# Altium PCB GD_Power_Meter_Draft.PCBDOC
Units mm, origin at the board's own origin, x right, y up, seen from the top; angles counter-clockwise.
Board outline 113.75 x 112.25 mm, 2 copper layers (Top Layer, Bottom Layer); 84 components, 54 nets, 246 pads, 261 vias.
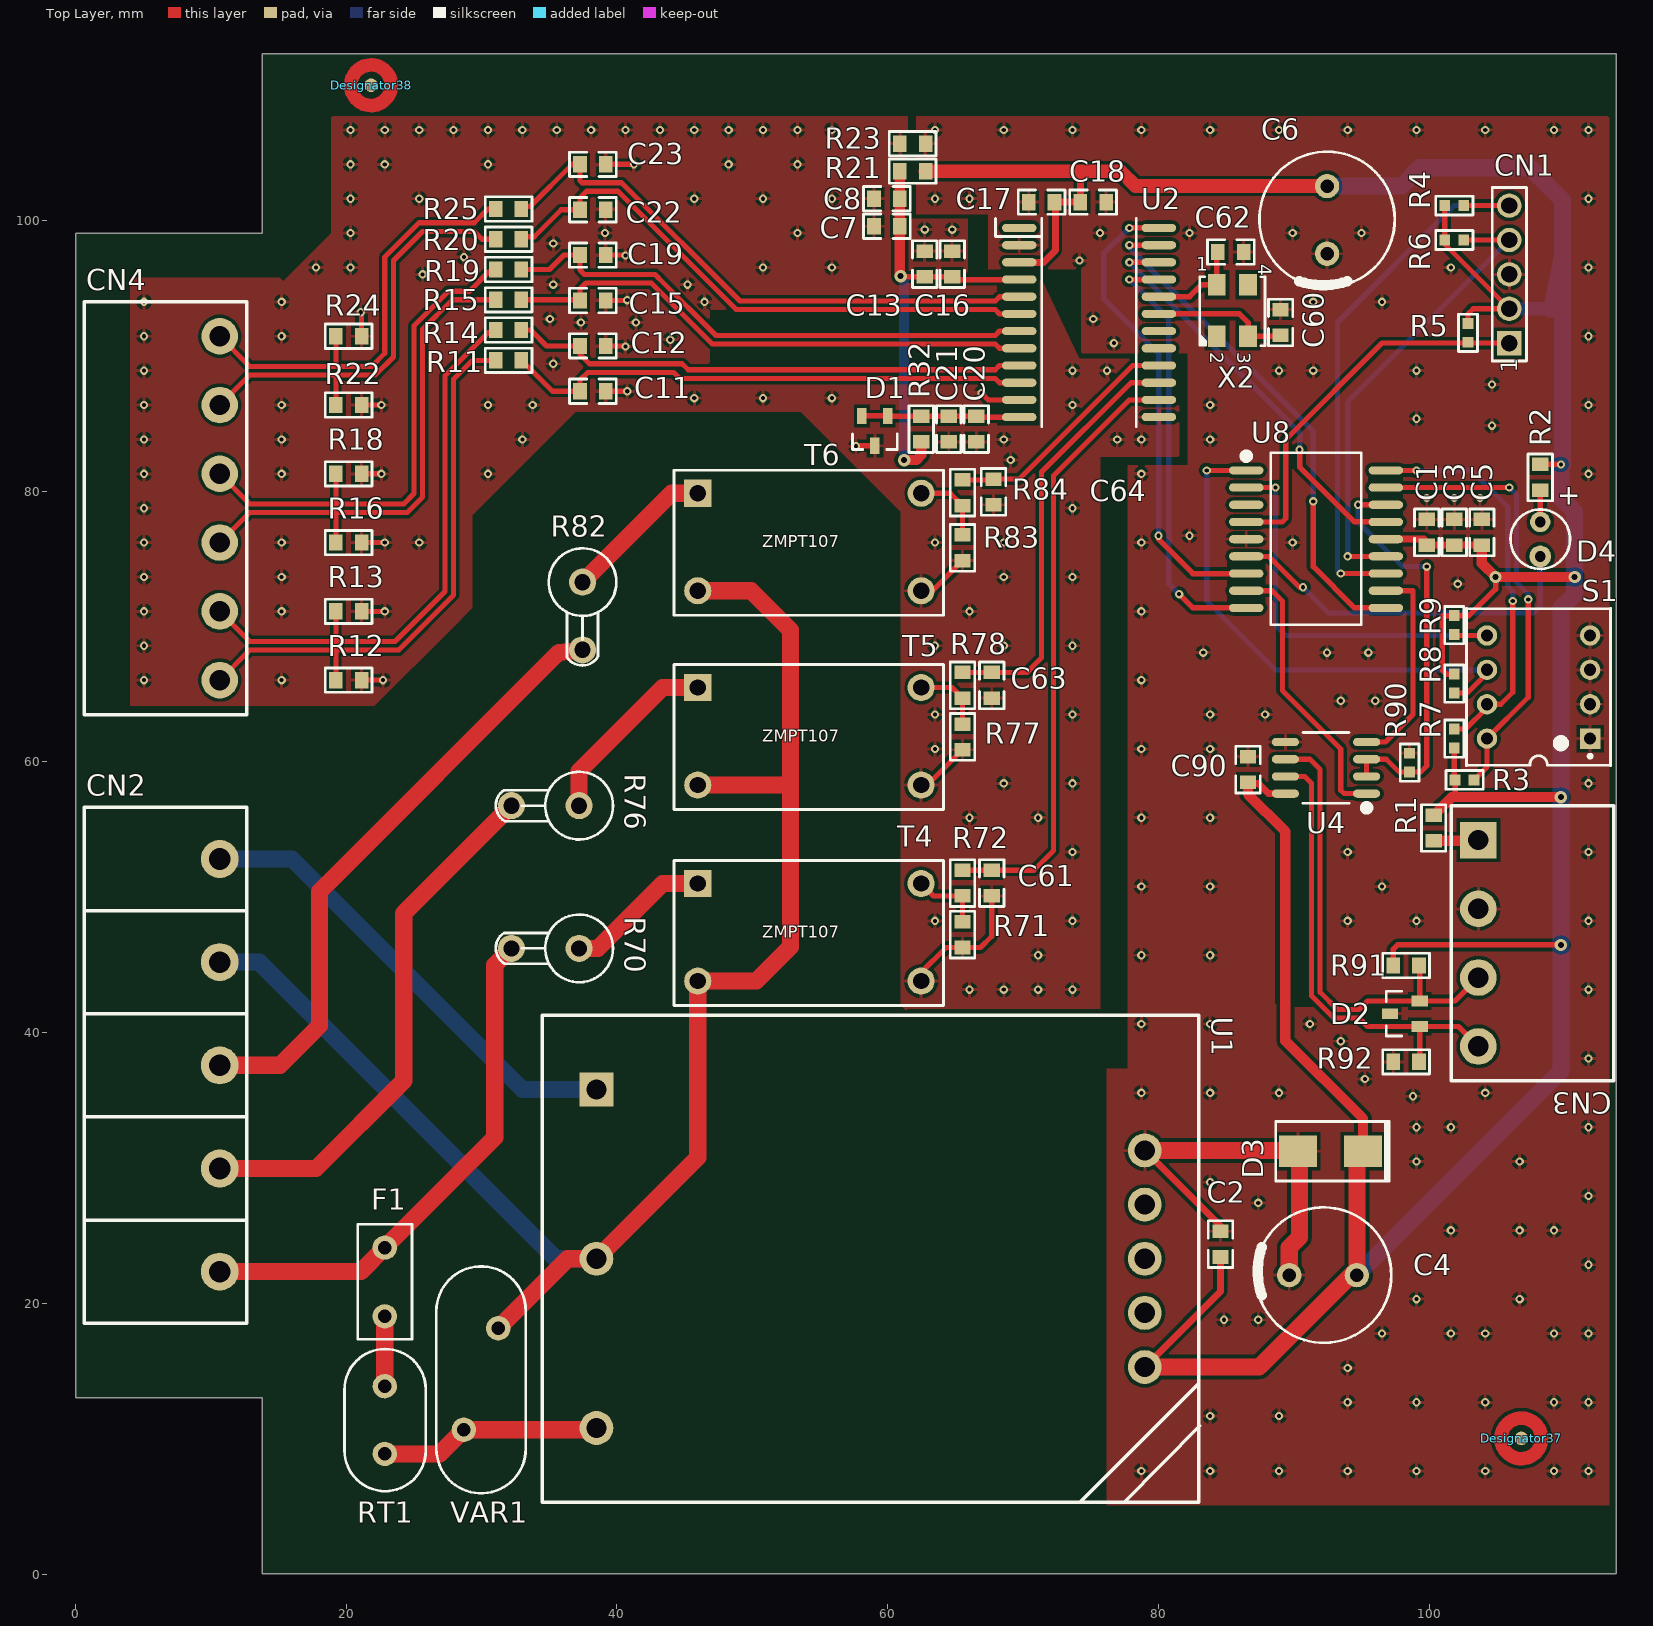
[diagram p0: Top Layer view]
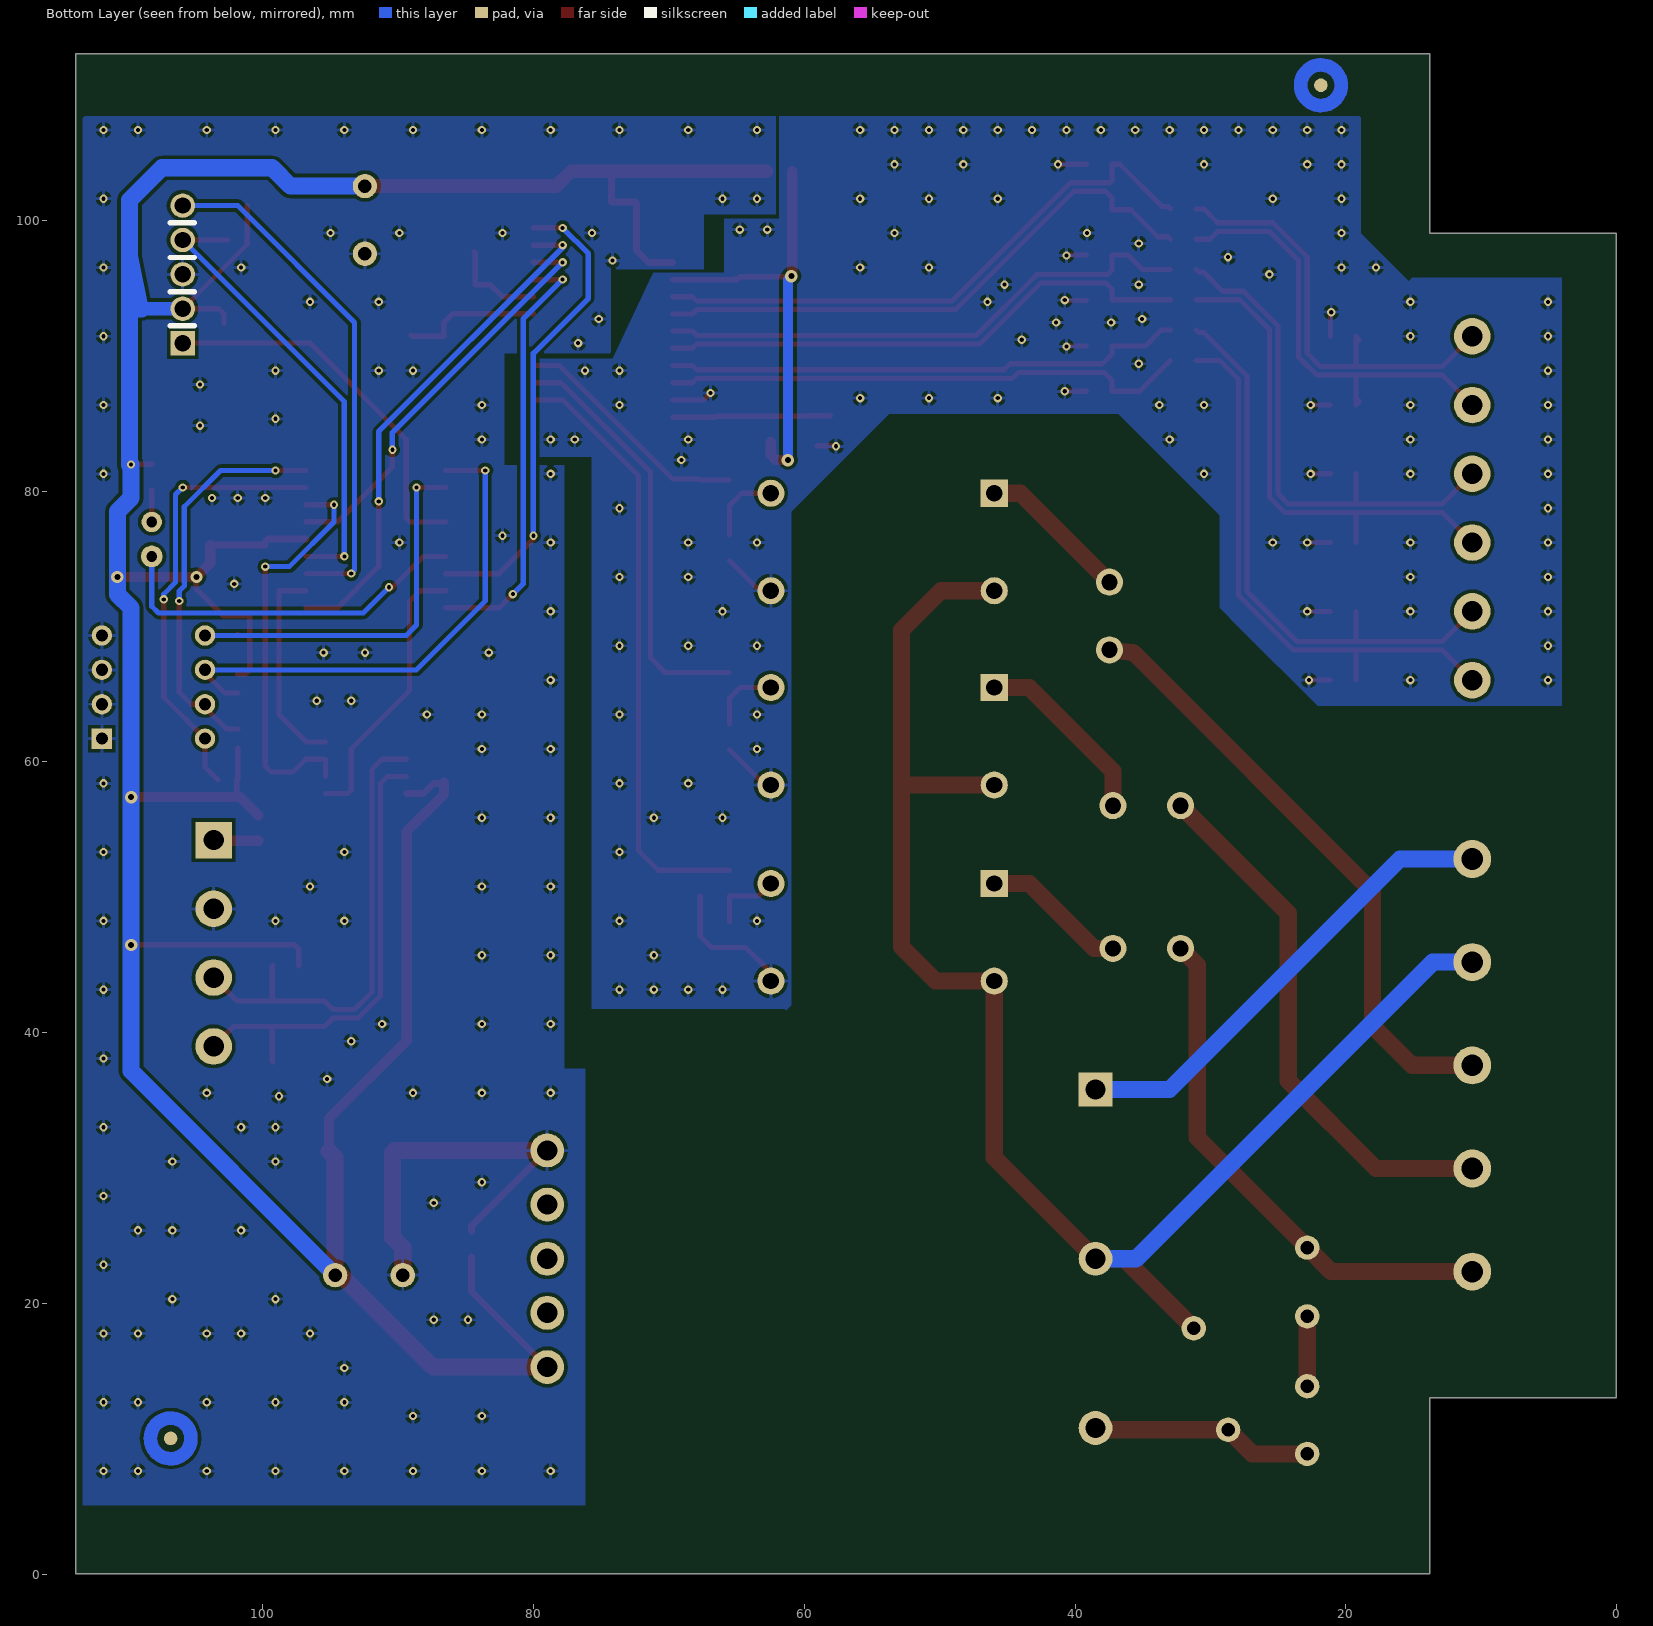
[diagram p1: Bottom Layer view, seen from below]

## Layer stack, top to bottom
Top Solder: solder mask 0.0102, Solder Resist, Dk 3.5
Top Layer: signal copper 0.0356
Dielectric 1: dielectric 0.32, FR-4, Dk 4.8
Bottom Layer: signal copper 0.0356
Bottom Solder: solder mask 0.0102, Solder Resist, Dk 3.5

## Board outline
0.05,99.04 0.05,13.04 13.8,13.04 13.8,0.04 113.8,0.04 113.8,112.29 13.8,112.29 13.8,99.04

## Design rules (kind name [scope] priority, off if disabled: settings)
Clearance [All] p1: gap=0.254 except(0.127: SMDPad-Text THPad-Text)
DiffPairsRouting [All] p1: maxlimit=0.254 minlimit=0.254 mostfreqgap=0.254 toplayer_minwidth=0.381 toplayer_maxwidth=0.381 toplayer_prefwidth=0.381 bottomlayer_minwidth=0.381 bottomlayer_maxwidth=0.381 bottomlayer_prefwidth=0.381 maxuncoupledlength=12.7
PolygonConnect [All] p1: connectstyle=Relief reliefconductorwidth=0.254 reliefentries=4 polygonreliefangle="90 Angle" airgapwidth=0.254
RoutingVias [All] p1: holewidth=0.305 width=0.61 viastyle="Through Hole" minholewidth=0.254 minwidth=0.508 maxholewidth=0.711 maxwidth=1.27
SilkToSilkClearance [All] p1: silktosilkclearance=0.025
SilkToSolderMaskClearance [IsPad] p1: minsilkscreentomaskgap=0.025 clearancetoexposedcopper=TRUE
SolderMaskExpansion [All] p1: expansion=0.102
UnpouredPolygon [All] p1: allowunpoured=FALSE
Width [All] p1: maxlimit=1.27 minlimit=0.254 preferedwidth=0.254
26 further rules are at their usual default settings.

## Classes and differential pairs
component class 7758_1: C7 C8 C11 C12 C13 C15 C16 C17 C18 C19 C20 C21 C22 C23 C60 C61 C62 C63 C64 CN4 D1 R11 R12 R13 R14 R15 R16 R18 R19 R20 R21 R22 R23 R24 R25 R32 R70 R71 R72 R76 R77 R78 R82 R83 R84 T4 T5 T6 U2 X2
component class GD_Power_Meter_1: C1 C2 C3 C4 C5 C6 C90 CN1 CN2 CN3 D2 D3 D4 F1 R1 R2 R3 R4 R5 R6 R7 R8 R9 R90 R91 R92 RT1 S1 U1 U4 U8 VAR1
differential pair IA: +IC_P -IC_N
differential pair IB: +IB_P -IB_N
differential pair IC: +IA_P -IA_N
differential pair A: +A_P -A_N
differential pair B: +B_P -B_N
differential pair C: +C_P -C_N
differential pair RS485: +RS485_P -RS485_N

## Components (designator, comment, footprint, x,y, rotation, side; value= is the part's Value field where it differs from the comment)
C1 "CAP" C0805 99.822,76.962 r90 top
C2 "CAP" C0805 84.582,24.384 r90 top
C3 "CAP" C0805 101.854,76.962 r90 top
C4 "CAPACITOR" CA10X16P5 89.662,22.098 r0 top
C5 "CAP" C0805 103.886,76.962 r90 top
C6 "CAPACITOR" CA10X16P5 92.456,97.536 r90 top
C7 "CAP" C0805 59.944,99.568 r0 top
C8 "CAP" C0805 59.944,101.6 r0 top
C11 "CAP" C0805 38.227,87.376 r180 top
C12 "CAP" C0805 38.227,90.729 r180 top
C13 "10uF" C0805 62.738,96.774 r270 top
C15 "CAP" C0805 38.227,94.082 r180 top
C16 "CAP" C0805 64.77,96.774 r270 top
C17 "10uF" C0805 71.374,101.346 r180 top
C18 "CAP" C0805 75.184,101.346 r0 top
C19 "CAP" C0805 38.227,97.434 r180 top
C20 "CAP" C0805 66.548,84.582 r90 top
C21 "CAP" C0805 64.516,84.582 r90 top
C22 "CAP" C0805 38.227,100.787 r180 top
C23 "CAP" C0805 38.227,104.14 r180 top
C60 "CAP" C0805 89.027,92.456 r90 top
C61 "CAP" C0805 67.691,51.054 r90 top
C62 "CAP" C0805 85.344,97.663 r0 top
C63 "CAP" C0805 67.691,65.659 r90 top
C64 "CAP" C0805 67.818,79.944 r90 top
C90 "CAP" C0805 86.614,59.436 r90 top
CN1 "SIP5" SIP5 105.918,90.932 r90 top
CN2 "Header 5" KF7.62-5P 10.668,22.352 r90 top locked
CN3 "Header 4" HT5.08-4P-H 103.632,54.229 r270 top
CN4 "Header 6" HT5.08-6P-H 10.668,66.04 r90 top
D1 "Diode-3_2" SOT23-321 59.055,84.455 r180 top
D2 "TVS-D" SOT23-123 98.298,41.402 r90 top
D3 "ZENER" SMB 92.71,31.242 r180 top
D4 "ED00056" LED_DIP 108.204,76.454 r270 top
Designator37 "Comment" MARK2 106.807,10.033 r270 top
Designator38 "Comment" MARK2 21.844,109.982 r270 top
F1 "Fuse" 392XXXX000 22.86,24.13 r270 top
R1 "RES" R0805 100.33,55.118 r90 top
R2 "RES" R0805 108.204,81.026 r90 top
R3 "RES" R0603 102.616,58.674 r0 top
R4 "RES" R0603 101.854,101.092 r0 top
R5 "RES" R0603 102.87,91.694 r270 top
R6 "RES" R0603 101.854,98.552 r0 top
R7 "RES" R0603 101.854,61.722 r90 top
R8 "RES" R0603 101.854,65.786 r270 top
R9 "RES" R0603 101.854,70.104 r270 top
R11 "RES" R0805 32.004,89.662 r0 top
R12 "RES" R0805 20.193,66.04 r0 top
R13 "RES" R0805 20.193,71.12 r0 top
R14 "RES" R0805 32.004,91.897 r0 top
R15 "RES" R0805 32.004,94.132 r0 top
R16 "RES" R0805 20.193,76.2 r0 top
R18 "RES" R0805 20.193,81.28 r0 top
R19 "RES" R0805 32.004,96.368 r0 top
R20 "RES" R0805 32.004,98.603 r0 top
R21 "RES" R0805 61.849,103.632 r180 top
R22 "RES" R0805 20.193,86.36 r0 top
R23 "RES" R0805 61.849,105.664 r0 top
R24 "RES" R0805 20.193,91.44 r0 top
R25 "RES" R0805 32.004,100.838 r0 top
R32 "RES" R0805 62.484,84.582 r270 top
R70 "RES" MFR5W2P5 32.211,46.228 r0 top
R71 "RES" R0805 65.532,47.244 r90 top
R72 "RES" R0805 65.532,51.054 r90 top
R76 "RES" MFR5W2P5 32.211,56.769 r0 top
R77 "RES" R0805 65.532,61.849 r90 top
R78 "RES" R0805 65.532,65.659 r90 top
R82 "RES" MFR5W2P5 37.465,68.279 r90 top
R83 "RES" R0805 65.532,75.819 r90 top
R84 "RES" R0805 65.532,79.883 r90 top
R90 "RES" R0603 98.552,59.944 r270 top
R91 "RES" R0805 98.298,44.958 r0 top
R92 "RES" R0805 98.298,37.846 r180 top
RT1 "NTC" NTC8_5x6P5 22.86,13.89 r270 top
S1 "SW-DIP4" SW_4P 108.077,65.532 r180 top
T4 "ET00010" ZMPT107 54.224,47.415 r0 top
T5 "ET00010" ZMPT107 54.224,61.893 r0 top
T6 "ET00010" ZMPT107 54.224,76.244 r0 top
U1 "LH05-10B05" LH05X 38.494,35.804 r0 top locked
U2 "ADE7758" SOIC24-W 69.723,99.441 r270 top
U4 "SN65HVD11D" SOIC8 95.377,57.658 r90 top
U8 "PIC16LF1827" SO18 86.487,81.534 r270 top
VAR1 "VARISTOR" VAR16_7X6_6P7_5 31.242,18.168 r270 top
X2 "ABM3C" XTAL_5X3_2 85.471,93.345 r270 top

## Footprints (in the part's own frame and the unit in brackets; to place one, negate y for a bottom-side part, rotate by r counter-clockwise, add the part's x,y. Pads: shape width x height; smd on the part's side, far side on the other; paste and mask are expansions set on the pad)
392XXXX000 [mm] "8.5X4X8"
  round 1.8 hole 1: 1(0,0) 2(5.08,0)
  silkscreen extent -1.73,-1.99 6.77,2.01, body extent -1.73,-1.99 6.77,2.01, height 8
C0805 [mm]
  rect 1x1.2 smd: 1(-0.95,0) 2(0.95,0)
  silkscreen extent -1.73,-0.9 1.73,0.9, body extent -1.55,-0.7 1.55,0.7, height 1
CA10X16P5 [mm]
  round 1.8 hole 1: 1(0,0) 2(5,0)
  silkscreen extent -2.46,-5 7.54,5, body extent -2.47,-5.01 7.55,5.01, height 16
HT5.08-4P-H [mm]
  rect 2.7x2.7 hole 1.5: 1(0,0)
  round 2.7 hole 1.5: 2(5.08,0) 3(10.16,0) 4(15.24,0)
  silkscreen extent -2.54,-2 17.78,10, body extent -2.54,-2.03 17.78,10.03, height 12
HT5.08-6P-H [mm]
  round 2.7 hole 1.5: 1(0,0) 2(5.08,0) 3(10.16,0) 4(15.24,0) 5(20.32,0) 6(25.4,0)
  silkscreen extent -2.54,-2 27.94,10, body extent -2.54,-2.03 27.94,10.03, height 12
KF7.62-5P [mm]
  round 2.8 hole 1.6: 1(0,0) 2(7.62,0) 3(15.24,0) 4(22.86,0) 5(30.48,0)
  silkscreen extent -3.81,-2 34.29,10, body extent -3.68,-1.91 34.16,9.91, height 12.4
LED_DIP [mm]
  round 1.5 hole 0.8: 1(-1.27,0)
  round 1.6 hole 0.8: 2(1.27,0)
  silkscreen extent -2.2,-2.2 2.2,2.2, body extent -2.18,-2.2 2.2,2.2, height 5
LH05X [mm]
  rect 2.5x2.5 hole 1.5: 1(0,0)
  round 2.5 hole 1.5: 2(0,-12.5) 3(0,-25) 4(40.5,-4.5) 5(40.5,-8.5) 6(40.5,-12.5) 7(40.5,-16.5) 8(40.5,-20.5)
  silkscreen extent -4,-30.5 44.56,5.5, body extent -3.94,-30.48 44.58,5.46, height 20.5
MARK2 [mm]
  round 1 smd: 1(0,0)
  round 1 smd far side: 1(0,0)
  Top Layer circle w1: c0,0 r1.5
  Bottom Layer circle w1: c0,0 r1.5
MFR5W2P5 [mm]
  round 2 hole 1.2: 1(0,0) 2(5,0)
  silkscreen extent -1.15,-2.5 7.5,2.5, body extent -1.1,-2.49 7.5,2.5, height 15.5
NTC8_5x6P5 [mm] "8_5x6P5x13"
  round 1.8 hole 1: 1(0,0) 2(5,0)
  silkscreen extent -2.75,-2.98 7.75,3.03, body extent -2.9,-3.1 7.8,3.1, height 13
R0603 [mm]
  rect 0.8x0.8 smd: 1(-0.7,0) 2(0.7,0)
  silkscreen extent -1.38,-0.7 1.38,0.7
R0805 [mm]
  rect 1x1.2 smd: 1(-0.95,0) 2(0.95,0)
  silkscreen extent -1.73,-0.9 1.73,0.9, body extent -1.55,-0.7 1.55,0.7, height 1
SIP5 [mm]
  rect 1.8x1.8 hole 1.2: 1(0,0)
  round 1.8 hole 1.2: 2(2.54,0) 3(5.08,0) 4(7.62,0) 5(10.16,0)
  silkscreen extent -1.32,-1.27 11.5,1.27, body extent -1.42,-1.37 11.6,1.37, height 7
SMB [mm] "P6SMB"
  rect 2.8x2.3 smd: 1(-2.4,0) 2(2.4,0)
  silkscreen extent -4.35,-2.2 4.05,2.2, body extent -4.45,-2.3 4.15,2.3, height 2.5
SO18 [mil]
  oval 24x100 smd: 1(0,0) 2(50,0) 3(100,0) 4(150,0) 5(200,0) 6(250,0) 7(300,0) 8(350,0) 9(400,0) 10(400,406) 11(350,406) 12(300,406) 13(250,406) 14(200,406) 15(150,406) 16(100,406) 17(50,406) 18(0,406)
  silkscreen extent -51,-10 449,335, body extent -51,71 449,335, height 102
SOIC8 [mm]
  oval 0.61x2 smd: 1(0,0) 2(1.27,0) 3(2.54,0) 4(3.81,0) 5(3.81,6) 6(2.54,6) 7(1.27,6) 8(0,6)
  silkscreen extent -1.3,-0.25 4.51,4.7, body extent -0.7,1.3 4.51,4.7, height 1.75
SOIC24-W [mm]
  oval 0.61x2.54 smd: 1(0,0) 2(1.27,0) 3(2.54,0) 4(3.81,0) 5(5.08,0) 6(6.35,0) 7(7.62,0) 8(8.89,0) 9(10.16,0) 10(11.43,0) 11(12.7,0) 12(13.97,0) 13(13.97,10.312) 14(12.7,10.312) 15(11.43,10.312) 16(10.16,10.312) 17(8.89,10.312) 18(7.62,10.312) 19(6.35,10.312) 20(5.08,10.312) 21(3.81,10.312) 22(2.54,10.312) 23(1.27,10.312) 24(0,10.312)
  silkscreen extent -0.7,-1.75 14.67,8.64, body extent -0.7,1.65 14.67,8.64, height 2.5
SOT23-123 [mm]
  rect 0.8x1.2 smd: 1(-0.95,-1) 2(0.95,-1) 3(0,1.2)
  silkscreen extent -1.65,0.33 1.65,1.48, body extent -1.6,-1.3 1.6,1.3, height 1.2
SOT23-321 [mm]
  rect 0.7x1.2 smd: 1(0,1.1) 2(0.95,-1.1) 3(-0.95,-1.1)
  silkscreen extent -1.65,0.23 1.65,1.38
SW_4P [mm] "DIP; 8 Leads; Row Spacing 7.62 mm; Pitch 2.54 mm"
  rect 1.5x1.5 hole 0.9: 1(-3.81,3.81)
  round 1.5 hole 0.9: 2(-3.81,1.27) 3(-3.81,-1.27) 4(-3.81,-3.81) 5(3.81,-3.81) 6(3.81,-1.27) 7(3.81,1.27) 8(3.81,3.81)
  silkscreen extent -5.32,-5.81 5.32,5.81, body extent -5.33,-5.72 5.33,5.72, height 9.8
VAR16_7X6_6P7_5 [mm]
  round 1.8 hole 1: 1(0,0) 2(7.5,-2.54)
  silkscreen extent -4.57,-4.57 12.19,2.03, body extent -4.5,-4.6 12.2,2, height 21
XTAL_5X3_2 [mm] "ABM3C"
  rect 1.6x1.3 smd: 1(-1.9,-1.15) 2(1.9,-1.15) 3(1.9,1.15) 4(-1.9,1.15)
  silkscreen extent -2.5,-2.42 2.6,2.4, body extent -2.5,-2.42 2.6,2.4, height 2
ZMPT107 [mm]
  rect 2x2 hole 1.2: 1(-8.25,3.6)
  round 2 hole 1.2: 2(-8.25,-3.6) 3(8.25,3.6) 4(8.25,-3.6)
  silkscreen extent -10,-5.4 9.9,5.3, body extent -10.1,-5.5 10,5.4, height 18.9

## Part data
C1 C2 C8 C16 C18 C20 C90: library part EC00014, "CAP SMD CR X7R 50V 10% 0.1uF 0805 ROHS"
C3: library part EC00018, "CAP SMD CR X7R 50V 10% 10nF 0805 ROHS"
C4 C6: library part EC00095, "CAP 35V 20% 330uF 10X16X0.6MM ROHS，7000hours"
C5 C7 C21: library part EC00002, "CAP SMD CR X7R 50V 10% 1uF 0805 ROHS"
C11 C12 C15 C19 C22 C23 C61 C63 C64: library part EC00079, "CAP SMD X7R 50V 10% 0.033uF 0805 ROHS"
C13 C17: library part EC00034, "CAP SMD CR X5R 16V 10% 10uF 0805 ROHS"
C60 C62: library part EC00017, "CAP SMD C0G 50V 5% 33pF 0805 ROHS"
CN1: library part EJ00017, "CONNECTOR 5PIN,2.54PITCH,SIP-5"
CN2: "Header, 5-Pin , 2p+ 3p"
CN3: "Header, 4-Pin"
CN4: "Header, 6-Pin"
D1: library part EU00043, "IC PROGRAMMABLE PRECISION REFERENCES,2.5-20V,0.5%,SMD,ROHS"
D2: library part ED00007, "DIODE TVS 7V 12V 17A 400W SOT-23 SMD ROHS"
D3: library part ED00032
D4: "3.0mm Round Type LED Lamps Yellow/Green"
F1: library part EF00005, "FUSE,Ceramic,1.6A,25A@250VAC,8.5x8mm,ROHS"
R1 R21 R23: library part ER00026, "RES THICK_FILM SMD 0 OHM 5% 1/8W ROHS 0805"
R2: library part ER00028
R3 R4 R5 R6 R7 R8 R9 R90: library part ER00213, "RES THICK_FILM SMD 10K ohm 5% 1/10W ROHS 0603"
R11 R14 R15 R19 R20 R25 R72 R78 R84: library part ER00028, "RES THICK_FILM SMD 1K 1% 1/8W ROHS 0805"
R12 R13 R16 R18 R22 R24: library part ER00273, "RES THIN_FILM SMD 3.32 ohm 0.5% 1/8W ±50ppm/℃ ROHS 0805"
R32: library part ER00108, "RES THICK_FILM 2.49K 1% 1/8W ROHS SMD 0805"
R70 R76 R82: library part ER00275, "RES Film Leaded 165K 0.5% 3W ROHS ±25ppm/℃ MFR1550"
R71 R77 R83: library part ER00280, "RES,THIN_FILM,130 ohm,0.5%	,1/10W,±25ppm/℃,ROHS,0805,SMD"
R91 R92: library part ER00021, "RES THICK_FILM SMD 39K 5% 1/8W ROHS 0805"
RT1: library part EF00003
S1: "侧拨 4位"
T4 T5 T6: "Voltage transformer,2mA/2mA,THT,ROHS"
U2: library part EU00042, "IC Energy Measurement,Irms,VA,VAR,Vrms,Watt,Output:Pulsed&SPI,SOIC_W-24,ROHS"
U4: library part EU00041, "IC 5V,RS-485,10Mbps,16KV,TRANSCEIVERS,SOIC-8,ROHS"
U8: library part EU00033, "IC 8-bit UART SPI I2C,SOIC18-W,SMD,ROHS"
VAR1: library part ER00200, "MOV 320V 14MM 80J LDFR ROHS"
X2: library part EX00008, "XTAL 10MHz 18PF +/-30PPM,3.2mmWx5mmLx1.3mmH,-40~85,RoHS,SMD"

## Via types
v1: diameter 0.61, hole 0.305, Top Layer to Bottom Layer, tented both sides, 255 vias
v2: diameter 0.914, hole 0.457, Top Layer to Bottom Layer, tented both sides, 6 vias

## Nets (pads, with @x,y where several pads share a name; then routed paths per layer and width w, separated by ;. In a path a pad name is that pad's centre, name@x,y a point inside that pad or via, vN(x,y) a via of type N, cw(c..) or ccw(c..) an arc to the next point about the centre after c; other vN are vias at no path point)
5VF: C1.1 C2.1 C3.1 C4.2 C5.1 C6.2 C17.1 C18.1 C90.1 CN1.2 D3.1 R1.2 R2.2 R3.1 R4.1 R5.1 R6.1 R7.1 R8.1 R9.1 R21.1 R91.1 U1.8 U2.3 U4.8 U8.14 | length 294.3
  Top Layer w0.381: R4.1 R6.1 101.154,98.236 CN1.2 103.251,93.472 102.87,93.091 R5.1
  Top Layer w0.406: R91.1 97.348,46.167 97.663,46.482 v2(109.728,46.482) ; 101.666,57.404 101.916,57.654 R3.1 101.854,58.736 R7.1 ; R8.1 101.281,66.486 100.965,66.802 100.965,70.739 101.03,70.804 R9.1 102.935,70.804 104.902,72.771 v2(104.902,73.66) ; R2.2 v1(109.728,81.976)
  Top Layer w0.508: U2.3 71.501,96.901 72.39,97.79 72.39,101.28 72.456,101.346 C18.1 74.234,103.566 74.168,103.632 ; U1.8 84.582,20.892 C2.1 ; C90.1 86.68,58.42 87.376,58.42 88.138,57.658 U4.8 ; U8.14 99.634,76.454 C1.1@99.822,76.266 ; C1.1 C3.1 C5.1 ; v2(104.902,73.66) v2@105.156,73.66
  Top Layer w0.762: C90.1 86.614,57.627 89.377,54.864 89.377,39.401 95.11,33.668 D3.1 ; R1.2 101.666,57.404 v2(109.728,57.404) ; C5.1 103.886,74.676 v2(104.902,73.66) ; v2@105.156,73.66 v2(110.744,73.66)
  Top Layer w1.016: R21.1 74.168,103.632 77.216,103.632 78.312,102.536 C6.2
  Top Layer w1.27: U1.8 87.44,15.304 94.234,22.098 C4.2 94.662,30.794 D3.1
  Bottom Layer w1.016: CN1.2 108.966,93.472
  Bottom Layer w1.27: C6.2 97.964,102.536 99.314,103.886 107.442,103.886 109.847,101.481 109.847,97.29 ; C4.2 109.728,37.164 v2(109.728,46.482) v2(109.728,57.404) 109.728,71.374 110.744,72.39 v2(110.744,73.66) 110.744,78.486 109.728,79.502 v1(109.728,81.976) ; 108.966,93.472 109.078,93.472 109.847,97.29 ; v1@109.847,81.923 109.847,97.29
A_N: C22.2 R20.2 U2.6 | length 42.5
  Top Layer w0.381: R20.2 33.145,98.793 33.896,98.793 35.89,100.787 C22.2 37.277,101.666 37.757,102.146 40.085,102.146 48.822,93.408 67.945,93.408 68.263,93.091 U2.6
A_P: C23.2 R25.2 U2.5 | length 43.2
  Top Layer w0.381: R25.2 33.145,101.028 33.591,101.028 36.703,104.14 C23.2 37.277,102.931 37.427,102.781 40.348,102.781 49.085,94.043 67.945,94.043 68.263,94.361 U2.5
AGND: C7.1 C8.1 C11.1 C12.1 C13.1 C15.1 C16.1 C19.1 C20.1 C21.1 C22.1 C23.1 C61.1 C63.1 C64.1 D1.1 R12.2 R13.2 R16.2 R18.2 R22.2 R23.1 R24.2 R71.1 R77.1 R83.1 T4.4 T5.4 T6.4 U2.11 U2.13 | length 40.5
  Top Layer w0.381: v1(21.082,93.218) 21.143,93.157 R24.2 ; R12.2 v1(22.733,66.04) ; R13.2 v1(22.86,71.12) ; R16.2 v1(22.86,76.2) ; R18.2 v1(22.606,81.28) ; R22.2 v1(22.606,86.36) ; C11.1 v1(40.767,87.376) ; C12.1 40.589,90.729 v1(40.64,90.678) ; C15.1 40.742,94.082 v1(40.767,94.107) ; C19.1 40.615,97.434 v1(40.64,97.409) ; C23.1 v1(41.275,104.14) ; v1(57.658,83.312) 57.701,83.355 D1.1 ; T4.4 62.474,44.44 64.328,46.294 R71.1 66.868,46.294 67.691,47.117 C61.1 ; T5.4 62.926,58.293 R77.1 ; T6.4 63.307,72.644 R83.1 ; v1(66.929,87.249) 67.437,86.741 U2.11
  other v1: 66.04,43.18 68.58,43.18 71.12,43.18 73.66,43.18 71.12,45.72 63.5,48.26 73.66,48.26 73.66,53.34 66.04,55.88 71.12,55.88 68.58,58.42 73.66,58.42 63.5,60.96 63.5,63.5 73.66,63.5 5.08,66.04 15.24,66.04 5.08,68.58 63.5,68.58 68.58,68.58 73.66,68.58 5.08,71.12 15.24,71.12 66.04,71.12 5.08,73.66 15.24,73.66 68.58,73.66 73.66,73.66 5.08,76.2 15.24,76.2 25.4,76.2 63.5,76.2 68.58,76.2 5.08,78.74 73.66,78.74 5.08,81.28 15.24,81.28 30.48,81.28 69.088,82.296 5.08,83.82 15.24,83.82 33.02,83.82 68.58,83.82 76.962,83.82 78.74,83.82 5.08,86.36 15.24,86.36 30.48,86.36 33.782,86.36 73.66,86.36 45.72,86.868 50.8,86.868 55.88,86.868 5.08,88.9 73.66,88.9 76.2,88.9 35.306,89.408 43.942,91.186 5.08,91.44 15.24,91.44 37.338,92.456 41.402,92.456 35.052,92.71 5.08,93.98 15.24,93.98 46.482,93.98 35.306,95.25 45.212,95.25 25.654,96.012 17.78,96.52 20.32,96.52 50.8,96.52 55.88,96.52 28.702,97.282 35.306,98.298 20.32,99.06 39.116,99.06 53.34,99.06 62.738,99.314 64.77,99.314 20.32,101.6 25.4,101.6 45.72,101.6 50.8,101.6 55.88,101.6 20.32,104.14 22.86,104.14 30.48,104.14 48.26,104.14 53.34,104.14 20.32,106.68 22.86,106.68 25.4,106.68 27.94,106.68 30.48,106.68 33.02,106.68 35.56,106.68 38.1,106.68 40.64,106.68 43.18,106.68 45.72,106.68 48.26,106.68 50.8,106.68 53.34,106.68 55.88,106.68
AVDD: C7.2 C8.2 C13.2 C16.2 R21.2 R32.2 U2.4 | length 32.8
  Top Layer w0.406: v2@60.894,95.951 v2(60.96,95.885) 61.021,95.824 C13.2 C16.2 64.963,95.631 C16.2@65.217,95.631 ; C16.2@65.151,95.697 C16.2@65.217,95.631 ; U2.4 C16.2@65.217,95.631
  Top Layer w0.762: v2@60.894,95.951 C7.2 ; C7.2@60.899,99.568 R21.2 ; v2(61.214,82.296) 62.103,82.296 62.484,82.677 R32.2
  Bottom Layer w0.762: v2(60.96,95.885) 61.214,95.631 v2(61.214,82.296)
B_N: C15.2 R15.2 U2.8 | length 39.8
  Top Layer w0.381: R15.2 37.226,94.132 C15.2 37.277,94.935 37.719,95.377 42.545,95.377 47.053,90.868 67.945,90.868 68.263,90.551 U2.8
B_P: C19.2 R19.2 U2.7 | length 40.4
  Top Layer w0.381: R19.2 35.027,96.368 36.093,97.434 C19.2 37.277,96.327 37.592,96.012 42.808,96.012 43.062,95.758 47.317,91.504 67.945,91.504 68.263,91.821 U2.7
C_N: C11.2 R11.2 U2.10 | length 39.1
  Top Layer w0.381: R11.2 35.24,87.376 C11.2 37.277,88.204 37.846,88.773 44.196,88.773 44.64,88.328 67.945,88.328 68.263,88.011 U2.10
C_P: C12.2 R14.2 U2.9 | length 38.5
  Top Layer w0.381: R14.2 33.644,91.897 34.813,90.729 C12.2 37.277,90.104 37.973,89.408 44.822,89.408 45.266,88.963 67.945,88.963 68.263,89.281 U2.9
CS1: U2.21 U8.9 | length 32.3
  Top Layer w0.406: v1(77.851,95.631) U2.21 ; v1(81.534,72.39) 82.55,71.374 U8.9
  Bottom Layer w0.406: v1(77.851,95.631) 80.772,92.71 80.772,73.152 v1(81.534,72.39)
CS2: D4.2 U8.6 | length 27.3
  Top Layer w0.381: U8.6 88.138,75.184 90.424,72.898 v1(90.678,72.898)
  Bottom Layer w0.381: v1(90.678,72.898) 92.583,70.993 107.696,70.993 108.204,71.501 D4.2
GND: CN2.5 U1.1 | length 34.9
  Bottom Layer w1.27: CN2.5 16.002,52.832 33.03,35.804 U1.1
IA_N: CN4.5 R20.1 R22.1 | length 32.7
  Top Layer w0.381: CN4.5 12.89,88.582 19.304,88.582 ; R22.1@19.052,86.675 19.052,86.55 R22.1 19.243,88.521 19.304,88.582 ; R20.1 30.048,98.603 29.464,99.187 25.654,99.187 23.495,97.028 23.495,89.916 22.162,88.582 19.304,88.582
IA_P: CN4.6 R24.1 R25.1 | length 32.9
  Top Layer w0.381: CN4.6 12.89,89.218 19.177,89.218 ; R24.1@19.052,91.125 19.052,91.249 R24.1 19.243,89.283 19.177,89.218 ; R25.1 30.48,100.838 29.464,99.822 25.391,99.822 22.86,97.291 22.86,90.179 21.898,89.218 19.177,89.218
IB_N: CN4.3 R15.1 R16.1 | length 37.3
  Top Layer w0.381: CN4.3 12.89,78.422 19.177,78.422 ; R16.1 19.243,78.357 19.177,78.422 ; R15.1 27.838,94.132 25.654,91.948 25.654,79.556 24.52,78.422 19.177,78.422
IB_P: CN4.4 R18.1 R19.1 | length 38
  Top Layer w0.381: CN4.4 12.89,79.057 19.177,79.057 ; R18.1 19.243,79.123 19.177,79.057 ; R19.1 30.863,96.177 30.518,96.177 29.108,94.767 27.575,94.767 25.019,92.211 25.019,79.819 24.257,79.057 19.177,79.057
IC_N: CN4.1 R11.1 R12.1 | length 41.8
  Top Layer w0.381: CN4.1 12.89,68.263 19.177,68.263 ; R12.1 19.243,68.197 19.177,68.263 ; R11.1 29.337,89.662 27.94,88.265 27.94,72.317 23.885,68.263 19.177,68.263
IC_P: CN4.2 R13.1 R14.1 | length 42.4
  Top Layer w0.381: CN4.2 12.89,68.897 19.177,68.897 ; R13.1 19.243,68.963 19.177,68.897 ; R14.1 30.863,91.707 30.484,91.707 27.305,88.528 27.305,72.581 23.622,68.897 19.177,68.897
L1: CN2.3 R82.1 | length 45.2
  Top Layer w1.27: CN2.3 15.113,37.592 18.034,40.513 18.034,50.419 35.546,67.931 35.739,68.085 R82.1
L2: CN2.2 R76.1 | length 39.9
  Top Layer w1.27: CN2.2 17.78,29.972 24.257,36.449 24.257,48.815 R76.1
L3: CN2.1 F1.1 R70.1 | length 38.9
  Top Layer w1.27: CN2.1 21.082,22.352 F1.1 30.988,32.258 30.988,45.005 R70.1
N: CN2.4 T4.2 T5.2 T6.2 U1.2 VAR1.1 | length 116.1
  Top Layer w1.27: VAR1.1 36.378,23.304 U1.2 45.974,30.784 T4.2 50.292,43.815 52.832,46.355 52.832,58.293 ; T5.2 52.832,58.293 ; T6.2 49.911,72.644 52.832,69.723 52.832,58.293
  Bottom Layer w1.27: CN2.4 13.589,45.212 35.497,23.304 U1.2
NetC60_1: C60.1 U2.19 X2.3 | length 10.3
  Top Layer w0.406: U2.19 85.979,93.091 86.621,92.449 X2.3 88.966,91.445 C60.1
NetC62_1: C62.1 U2.20 X2.1 | length 7.1
  Top Layer w0.406: U2.20 82.301,94.361 83.185,95.245 X2.1 84.321,97.59 C62.1
NetCN1_1: CN1.1 R5.2 U8.4 | length 28.3
  Top Layer w0.381: U8.4 89.154,77.724 89.408,77.978 89.408,83.82 96.52,90.932 CN1.1
NetCN1_4: CN1.4 R6.2 U8.13 | length 34.5
  Top Layer w0.381: v1(93.98,75.184) U8.13 ; R6.2 CN1.4
  Bottom Layer w0.381: v1(93.98,75.184) 93.98,86.614 CN1.4
NetCN1_5: CN1.5 R4.2 U8.12 | length 41.6
  Top Layer w0.381: v1(93.472,73.914) U8.12 ; R4.2 CN1.5
  Bottom Layer w0.381: v1(93.472,73.914) 93.218,74.168 93.218,92.456 101.854,101.092 CN1.5
NetCN3_1: CN3.1 R1.1 | length 3.3
  Top Layer w0.762: R1.1 103.571,54.168 CN3.1
NetD4_1: D4.1 R2.1 | length 2.4
  Top Layer w0.406: D4.1 R2.1
NetF1_2: F1.2 RT1.1 | length 5.2
  Top Layer w1.27: RT1.1 F1.2
NetR3_2: R3.2 S1.8 U8.17 | length 32.9
  Top Layer w0.381: U8.17 v1(105.918,80.264) ; R3.2 104.267,59.625 S1.8 107.315,64.77 v1(107.315,72.009)
  Bottom Layer w0.381: v1(105.918,80.264) 106.439,79.743 106.439,73.266 107.315,72.39 v1(107.315,72.009)
NetR7_2: R7.2 S1.7 U8.18 | length 29.6
  Top Layer w0.381: U8.18 v1(99.06,81.534) ; R7.2 102.681,62.422 104.267,64.008 S1.7 105.283,64.262 106.172,65.151 v1(106.172,71.882)
  Bottom Layer w0.381: v1(99.06,81.534) 103.124,81.534 105.804,78.854 105.804,73.287 105.791,73.274 105.791,73.016 106.172,72.635 v1(106.172,71.882)
NetR8_2: R8.2 S1.6 U8.1 | length 38.7
  Top Layer w0.381: v1(83.566,81.534) U8.1 ; R8.2 102.805,65.086 104.267,66.548 S1.6
  Bottom Layer w0.381: v1(83.566,81.534) 83.566,71.882 88.646,66.802 S1.6
NetR9_2: R9.2 S1.5 U8.2 | length 30.7
  Top Layer w0.381: U8.2 v1(88.646,80.264) ; R9.2 101.916,69.342 S1.5
  Bottom Layer w0.381: v1(88.646,80.264) 88.646,70.104 89.408,69.342 S1.5
NetR70_2: R70.2 T4.1 | length 10.7
  Top Layer w1.27: R70.2 38.608,46.228 43.395,51.015 T4.1
NetR71_2: R71.2 R72.1 T4.3 | length 5.3
  Top Layer w0.381: T4.3 63.385,50.104 R72.1 R71.2
NetR76_2: R76.2 T5.1 | length 13.9
  Top Layer w1.27: R76.2 37.211,59.309 43.395,65.493 T5.1
NetR77_2: R77.2 R78.1 T5.3 | length 5.3
  Top Layer w0.381: T5.3 64.748,65.493 R78.1 R77.2
NetR82_2: R82.2 T6.1 | length 11.2
  Top Layer w1.27: R82.2 44.03,79.844 T6.1
NetR83_2: R83.2 R84.1 T6.3 | length 5.6
  Top Layer w0.381: T6.3 64.621,79.844 R84.1 R83.2
NetRT1_2: RT1.2 U1.3 VAR1.2 | length 16.4
  Top Layer w0.762: U1.3@38.358,10.668 U1.3
  Top Layer w1.27: RT1.2 26.924,8.89 VAR1.2 U1.3@38.358,10.668
RS485_N: CN3.4 D2.1 R92.1 U4.7 | length 34.5
  Top Layer w0.381: U4.7 90.805,58.928 91.313,58.42 91.313,42.727 92.955,41.085 94.805,41.085 95.438,40.452 D2.1 ; R92.1 99.298,37.896 D2.1 ; CN3.4 102.169,40.452 D2.1
  Bottom Layer w0.381: CN3.4 CN3.4@103.759,39.116
RS485_P: CN3.3 D2.2 R91.2 U4.6 | length 35.1
  Top Layer w0.381: U4.6 91.195,60.198 91.948,59.445 91.948,42.99 93.218,41.72 94.806,41.72 95.438,42.352 D2.2 ; R91.2 99.298,44.908 D2.2 ; CN3.3 101.915,42.352 D2.2
RS485EN: R90.2 U4.2 U4.3 U8.16 | length 30.8
  Top Layer w0.381: v1(94.742,78.994) U8.16 ; U4.2 U4.3 96.836,60.198 97.79,59.244 R90.2 99.376,59.244 99.822,59.69 v1(99.822,74.422)
  Bottom Layer w0.381: v1(94.742,78.994) 94.742,77.724 98.044,74.422 v1(99.822,74.422)
RX: U4.1 U8.8 | length 20.8
  Top Layer w0.381: U8.8 88.392,72.644 89.154,71.882 89.154,65.278 93.472,60.96 93.472,57.912 93.726,57.658 U4.1
SCK1: U2.23 U8.10 | length 38.2
  Top Layer w0.406: v1(77.851,98.171) U2.23 ; v1(91.44,79.248) 91.44,74.422 94.488,71.374 U8.10
  Bottom Layer w0.406: v1(77.851,98.171) 77.851,97.979 91.44,84.39 v1(91.44,79.248)
SDI1: U2.24 U8.7 | length 35.2
  Top Layer w0.406: v1(77.851,99.441) U2.24 ; v1(80.01,76.708) 80.01,76.454 82.55,73.914 U8.7
  Bottom Layer w0.406: v1(77.851,99.441) 75.946,97.536 75.946,94.234 80.01,90.17 v1(80.01,76.708)
SDO1: U2.22 U8.15 | length 30.6
  Top Layer w0.406: v1(77.851,96.901) U2.22 ; v1(90.424,83.058) 90.424,81.788 94.488,77.724 U8.15
  Bottom Layer w0.406: v1(77.851,96.901) 90.424,84.328 v1(90.424,83.058)
TX: U4.4 U8.11 | length 15.4
  Top Layer w0.381: U4.4 96.774,61.468 98.806,63.5 98.806,72.644 U8.11
VAP: C64.2 R84.2 U2.16 | length 18
  Top Layer w0.381: R84.2 67.757,80.833 C64.2 69.718,80.894 78.105,89.281 U2.16
VBP: C63.2 R78.2 U2.15 | length 31.4
  Top Layer w0.381: R78.2 C63.2 70.292,66.609 71.374,67.691 71.374,81.407 77.978,88.011 U2.15
VCP: C61.2 R72.2 U2.14 | length 45.1
  Top Layer w0.381: R72.2 C61.2 70.8,52.004 72.263,53.467 72.263,81.153 77.851,86.741 U2.14
VREF: C20.2 C21.2 D1.2 D1.3 R32.1 U2.12 | length 11.7
  Top Layer w0.406: D1.2 D1.3 60.028,85.532 R32.1 C21.2 C20.2 66.609,85.471 U2.12
VSS: C1.2 C2.2 C3.2 C4.1 C5.2 C6.1 C17.2 C18.2 C60.2 C62.2 C90.2 CN1.3 CN3.2 D2.3 D3.2 R23.2 R90.1 R92.2 S1.1 S1.2 S1.3 S1.4 U1.4 U2.2 U4.5 U8.5 | length 29.1
  Top Layer w0.508: U1.4 84.582,25.716 C2.2
  Top Layer w1.27: U1.4 90.248,31.304 D3.2 90.424,31.128 90.424,24.892 89.662,24.13 C4.1
  other v1: 78.74,7.62 83.82,7.62 88.9,7.62 93.98,7.62 99.06,7.62 104.14,7.62 109.22,7.62 111.76,7.62 83.82,11.684 88.9,11.684 93.98,12.7 99.06,12.7 104.14,12.7 109.22,12.7 111.76,12.7 93.98,15.24 96.52,17.78 101.6,17.78 104.14,17.78 109.22,17.78 111.76,17.78 84.836,18.796 87.376,18.796 99.06,20.32 106.68,20.32 111.76,22.86 101.6,25.4 106.68,25.4 109.22,25.4 87.376,27.432 111.76,27.94 83.82,28.956 99.06,30.48 106.68,30.48 99.06,33.02 101.6,33.02 111.76,33.02 98.806,35.306 78.74,35.56 83.82,35.56 88.9,35.56 104.14,35.56 95.25,36.576 111.76,38.1 93.472,39.37 78.74,40.64 83.82,40.64 91.186,40.64 111.76,43.18 78.74,45.72 83.82,45.72 93.98,48.26 99.06,48.26 111.76,48.26 78.74,50.8 83.82,50.8 96.52,50.8 93.98,53.34 111.76,53.34 78.74,55.88 83.82,55.88 111.76,58.42 78.74,60.96 83.82,60.96 83.82,63.5 87.884,63.5 93.472,64.516 96.012,64.516 78.74,66.04 83.312,68.072 92.456,68.072 95.504,68.072 78.74,71.12 102.108,73.152 78.74,76.2 89.916,76.2 82.296,76.708 99.822,79.502 101.854,79.502 103.759,79.502 78.74,81.28 111.76,81.28 83.82,83.82 104.648,84.836 99.06,85.344 83.82,86.36 111.76,86.36 104.648,87.884 88.9,88.9 91.44,88.9 99.06,88.9 76.708,90.932 111.76,91.44 75.184,92.71 91.44,93.98 96.52,93.98 101.6,96.52 111.76,96.52 74.168,97.028 75.692,99.06 82.296,99.06 89.916,99.06 94.996,99.06 63.5,101.6 66.04,101.6 111.76,101.6 63.5,106.68 68.58,106.68 73.66,106.68 78.74,106.68 83.82,106.68 88.9,106.68 93.98,106.68 99.06,106.68 104.14,106.68 109.22,106.68 111.76,106.68
pads on no net: Designator37.1 Designator38.1 U1.5 U1.6 U1.7 U2.1 U2.17 U2.18 U8.3 X2.2 X2.4

## Polygon pours and split planes (outlines as drawn)
AGND on Top Layer "Top-AGND" (solid, pour order 6): 4.064,64.135 22.098,64.135 27.813,69.85 29.337,71.374 29.337,74.676 29.337,78.232 29.845,78.74 36.957,85.852 53.594,85.852 54.991,84.455 60.96,78.486 60.96,61.595 60.96,42.037 61.341,41.656 61.468,41.783 75.692,41.783 75.692,67.818 75.692,68.072 75.692,82.55 81.534,82.55 81.534,89.789 74.168,89.789 71.152,96.139 65.913,96.139 65.913,100.108 61.468,100.108 61.468,107.696 18.923,107.696 18.923,99.06 15.367,95.504 15.113,95.758 4.064,95.758
VSS on Top Layer "Top-VSS" (solid, pour order 8): 62.103,107.696 62.103,100.457 67.437,100.457 67.437,96.393 74.295,96.393 74.295,90.17 82.169,90.17 82.169,81.915 77.724,81.915 77.724,37.338 76.2,37.338 76.2,5.08 113.538,5.08 113.538,107.315 113.157,107.696
AGND on Bottom Layer "Bottom-AGND" (solid, pour order 5): 4.064,64.135 22.098,64.135 27.813,69.85 29.337,71.374 29.337,74.676 29.337,78.232 29.845,78.74 36.83,85.725 37.084,85.725 53.721,85.725 54.991,84.455 60.96,78.486 60.96,61.595 60.96,42.037 61.341,41.656 61.468,41.783 75.692,41.783 75.692,67.818 75.692,68.072 75.692,82.55 79.629,82.55 79.629,89.789 74.168,89.789 71.152,96.139 65.913,96.139 65.913,100.108 61.849,100.108 61.849,107.696 18.923,107.696 18.923,99.06 15.367,95.504 15.113,95.758 4.064,95.758
VSS on Bottom Layer "Top-VSS" (solid, pour order 7): 62.103,107.696 62.103,100.457 67.437,100.457 67.437,96.393 74.295,96.393 74.295,90.17 82.169,90.17 82.169,81.915 77.724,81.915 77.724,37.338 76.2,37.338 76.2,5.08 113.538,5.08 113.538,107.315 113.157,107.696

## Other copper
Top Layer:
  pour cut-out: 71.247,84.836 71.247,96.012 71.12,96.139 68.072,96.139 68.072,84.836
  pour cut-out: 30.226,88.646 30.226,101.854 34.036,101.854 33.782,101.6 33.782,88.646
  pour cut-out: 46.844,93.408 46.844,88.9 49.34,88.9 68.072,88.9 68.072,93.281 67.945,93.408
  pour cut-out: 107.696,71.882 107.696,64.77 104.648,61.722 103.632,61.722 103.632,63.057 103.474,63.215 104.775,64.516 105.664,64.516 105.664,64.643 106.172,65.151 106.172,71.882
  pour cut-out: 90.424,57.15 90.424,60.198 88.138,60.198 88.138,57.15
  pour cut-out: 88.646,58.674 91.059,58.674 91.44,58.293 91.44,41.91 88.9,41.91 88.646,42.164
  pour cut-out: 87.884,71.374 87.884,74.93 87.63,75.184 85.09,75.184 85.09,71.374
  pour cut-out: 98.044,71.374 95.504,71.374 95.504,81.534 98.044,81.534
  pour cut-out: 95.758,71.882 95.758,77.216 94.742,78.232
  pour cut-out: 95.758,71.882 95.758,77.47 94.615,77.47 92.329,79.756 91.821,79.756 91.821,74.295 94.276,71.84 95.716,71.84

## Silkscreen, mask and mechanical layers (free items; w line width, h text height)
Mechanical 1:
  lines w0.5: 0.05,99.04 0.05,13.04 13.8,13.04 13.8,0.04 113.8,0.04 ; 0.05,99.04 0.05,99.04 ; 0.05,99.04 13.8,99.04 ; 13.8,99.04 13.8,99.04 ; 13.8,99.04 13.8,112.29 ; 13.8,112.29 13.8,112.29 ; 13.8,112.29 113.8,112.29 ; 113.8,0.04 113.8,112.29 ; 113.8,0.04 113.8,0.04 ; 113.8,112.29 113.8,112.29
Drill Drawing:
  text ".Legend" at 16.002,162.56 h1.52
Mechanical 17:
  lines w5: 7.493,41.021 7.874,41.402 12.954,41.402 15.875,38.481 ; 14.478,48.641 15.486,47.609 15.714,47.199 ; 14.605,34.671 14.605,59.436 ; 15.748,20.32 15.748,22.733 20.574,27.559 24.511,27.559 26.67,25.4 ; 18.246,45.281 27.21,36.893 31.242,32.766 ; 21.082,40.64 21.082,53.848 ; 27.686,35.306 27.686,50.8 ; 34.544,28.956 34.544,40.513 ; 36.068,39.624 51.181,39.624 ; 41.783,83.312 50.292,83.312 50.546,83.566 ; 42.291,31.877 42.291,43.688 ; 42.291,43.434 42.291,77.851 ; 42.291,54.737 57.404,54.737 ; 43.307,69.088 58.42,69.088 ; 49.657,34.036 49.657,80.772
  lines w6: 1.143,61.214 23.622,61.214 32.385,69.977 32.385,76.708 38.354,82.677 ; 41.148,82.677 41.783,83.312
  lines w10: 13.8,0.04 113.8,0.04

## Text inside footprints (layer, text, board x,y; h text height)
CN1: Top Overlay "1" at 106.518,88.732 h1.2 r90
D4: Top Overlay "+" at 109.474,78.994 h1.5
T4: Top Overlay "ZMPT107" at 50.724,46.715 h1.52
T5: Top Overlay "ZMPT107" at 50.724,61.193 h1.52
T6: Top Overlay "ZMPT107" at 50.724,75.544 h1.52
X2: Top Overlay "1" at 82.804,96.266 h1; Top Overlay "2" at 83.821,90.245 h1 r270; Top Overlay "3" at 85.811,90.245 h1 r270; Top Overlay "4" at 87.376,96.774 h1 r270